# Altium PCB EtherIOv3_1.PcbDoc (part 2 of 2)
Units mil, origin at the board's own origin, x right, y up, seen from the top; angles counter-clockwise.
Board outline 4380 x 2505 mil, 2 copper layers (Top Layer, Bottom Layer), stack 63.824 mil thick; 108 components, 133 nets, 516 pads, 209 vias.
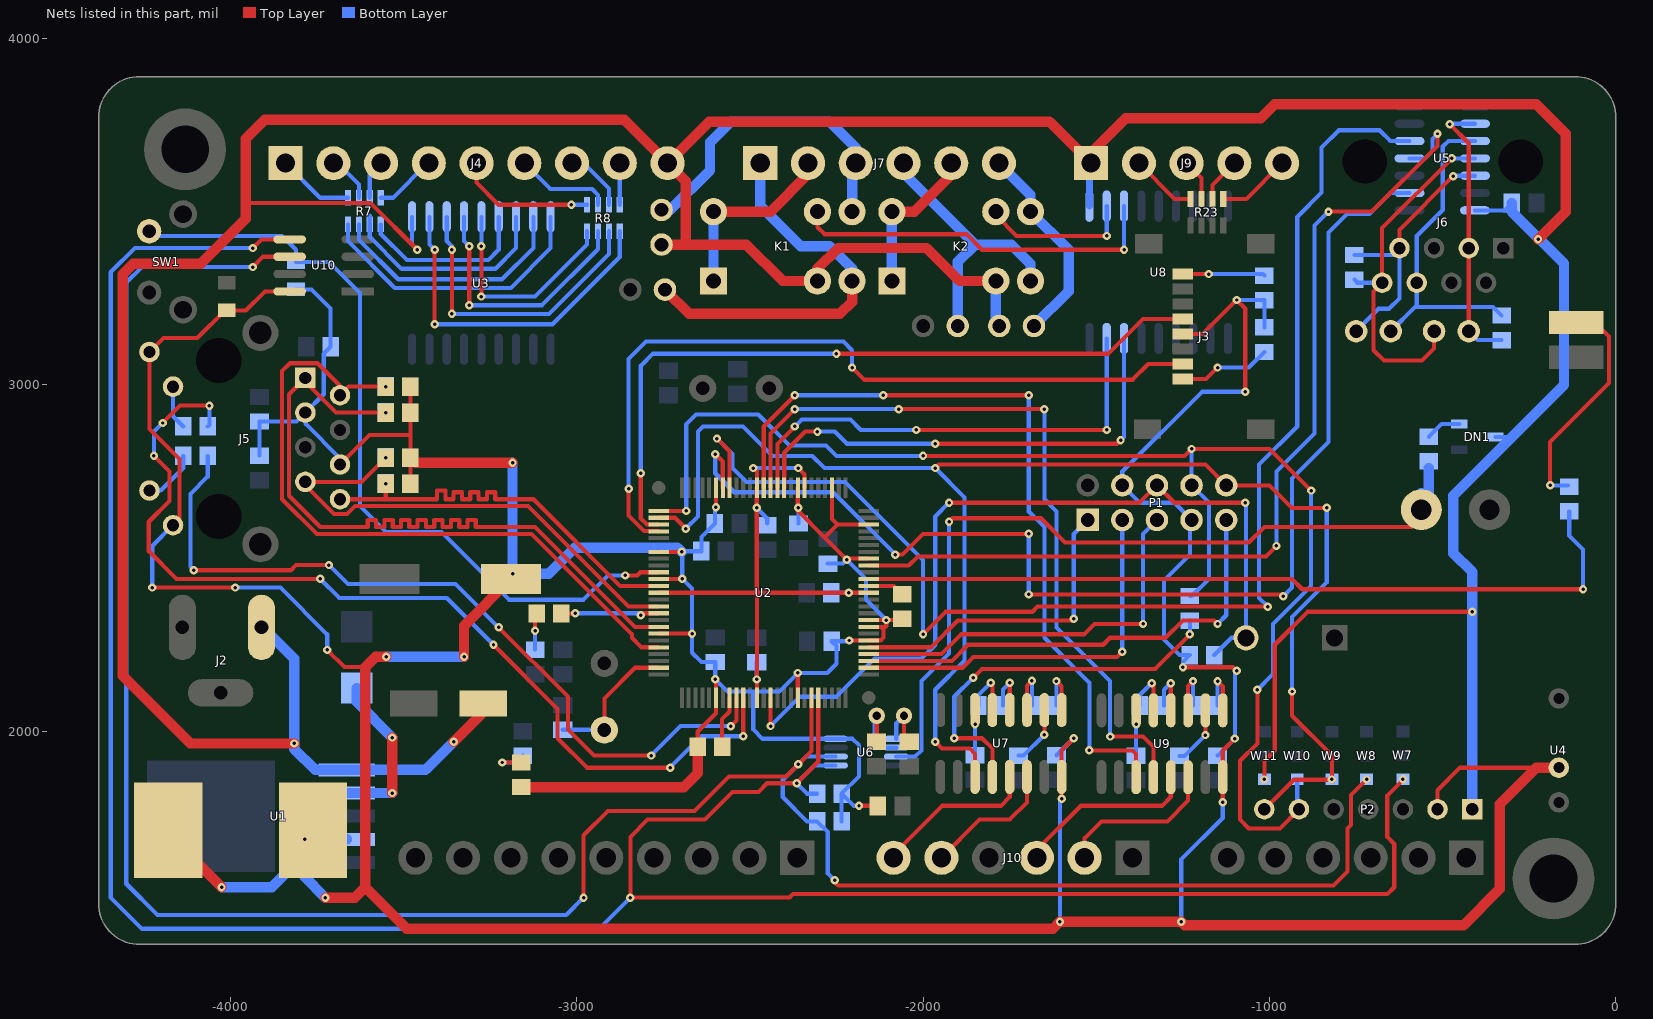
[diagram p2: the nets of this part, all layers, seen from the top]

## Via types
v1: diameter 24, hole 10, Top Layer to Bottom Layer, 206 vias
v2: diameter 24, hole 8, Top Layer to Bottom Layer, 3 vias

## Nets (pads, with @x,y where several pads share a name; then routed paths per layer and width w, separated by ;. In a path a pad name is that pad's centre, name@x,y a point inside that pad or via, vN(x,y) a via of type N, cw(c..) or ccw(c..) an arc to the next point about the centre after c; other vN are vias at no path point) (continued)
NetC10_2: C10.2 U2.49 X2.2 | length 404.8
  Top Layer w12: X2.2@-2920,2003.94 -2920,2095 -2831.54,2183.46 U2.49@-2763.15,2183.46
  Bottom Layer w12: C10.2@-3040,2004.57 -2920.63,2004.57 X2.2@-2920,2003.94
NetC20_2: C20.2 C21.2 C22.2 U2.7 U2.14 U2.38 U2.62 U2.88 | length 1624.5
  Top Layer w12: U2.38@-2763.15,2400 -2480,2400 ; v1(-2490,2760) -2479.68,2749.68 U2.14@-2479.68,2703.15 -2480,2702.83 v1(-2480,2645) -2480,2400 ; U2.62@-2479.68,2096.85 v1(-2479.68,2149.68) -2479.68,2399.68 -2480,2400 ; v1(-2360,2760) -2341.89,2741.89 U2.7@-2341.89,2703.15 ; U2.88@-2156.85,2400 v1(-2215,2400) -2480,2400
  Bottom Layer w12: v1(-2490,2760) v1(-2360,2760) ; v1@-2480,2150 C22.2@-2480,2199.13 ; v1(-2480,2645) -2450,2615 C21.2@-2450,2600.43 ; C20.2@-2265,2400 v1(-2215,2400)
NetC24_2: C24.2 R21.2 U6.3 | length 2397.9
  Top Layer w12: v1(-1925,2605) -1915,2615 -1660,2615 -1590,2545 -1060,2545 -1015,2590 -590,2590 -561.85,2618.15 C24.2@-561.85,2640
  Bottom Layer w12: U6.3@-2077.4,1927.2 -2022.8,1927.2 -2005,1945 -2005,2145 -1925,2225 v1(-1925,2605)
  Bottom Layer w30: C24.2@-561.85,2687.72 C24.2@-561.85,2640 -540.43,2661.42 R21.2@-540.43,2760
NetC25_2: C25.2 U6.1 X3.1 | length 156.7
  Top Layer w12: X3.1@-2055,2045 -2055,1985.43 C25.2@-2040,1970.43
  Bottom Layer w12: U6.1@-2077.4,1978.39 -2077.4,2022.6 X3.1@-2055,2045
NetC26_2: C26.2 U6.2 X3.2 | length 219.5
  Top Layer w12: C26.2@-2135,1970.43 -2133.74,1971.69 X3.2@-2133.74,2045
  Bottom Layer w12: X3.2@-2133.74,2045 -2140,2038.74 -2140,1975 -2117.8,1952.8 U6.2@-2077.4,1952.8
NetC29_1: C29.1 U7.3 | length 161.1
  Top Layer w12: U7.3@-1700,2061.46 -1700,2131.73 v1(-1685.87,2145.87)
  Bottom Layer w12: C29.1@-1685.87,2075 v1(-1685.87,2145.87)
NetC29_2: C29.2 U7.1 | length 159.8
  Top Layer w12: v1(-1615,2145) -1600,2130 U7.1@-1600,2061.46
  Bottom Layer w12: C29.2@-1615,2075 v1(-1615,2145)
NetC30_1: C30.1 U7.2 | length 171.3
  Top Layer w12: v1(-1650,1990) U7.2@-1650,2061.46
  Bottom Layer w12: C30.1@-1725,1930 -1710,1930 v1(-1650,1990)
NetC31_1: C31.1 U7.4 | length 151.5
  Top Layer w12: U7.4@-1750,2061.46 v1(-1750,2140)
  Bottom Layer w12: C31.1@-1769.13,2075 -1769.13,2120.87 v1(-1750,2140)
NetC31_2: C31.2 U7.5 | length 160.1
  Top Layer w12: v1(-1805,2140) -1800,2135 U7.5@-1800,2061.46
  Bottom Layer w12: C31.2@-1840,2075 -1840,2105 v1(-1805,2140)
NetC32_1: C32.1 U7.6 | length 130.6
  Top Layer w12: v1(-1850,2020) U7.6@-1850,2061.46
  Bottom Layer w12: C32.1@-1850,1930.87 v1(-1850,2020)
NetC34_1: C34.1 U9.3 | length 161.1
  Top Layer w12: U9.3@-1235,2060.59 -1235,2130.87 v1(-1220.87,2145)
  Bottom Layer w12: C34.1@-1220.87,2074.13 v1(-1220.87,2145)
NetC34_2: C34.2 U9.1 | length 159.8
  Top Layer w12: v1(-1150,2144.13) -1135,2129.13 U9.1@-1135,2060.59
  Bottom Layer w12: C34.2@-1150,2074.13 v1(-1150,2144.13)
NetC35_1: C35.1 U9.2 | length 171.3
  Top Layer w12: v1(-1185,1989.13) U9.2@-1185,2060.59
  Bottom Layer w12: C35.1@-1260,1929.13 -1245,1929.13 v1(-1185,1989.13)
NetC36_1: C36.1 U9.4 | length 151.5
  Top Layer w12: U9.4@-1285,2060.59 v1(-1285,2139.13)
  Bottom Layer w12: C36.1@-1304.13,2074.13 -1304.13,2120 v1(-1285,2139.13)
NetC36_2: C36.2 U9.5 | length 160.1
  Top Layer w12: v1(-1340,2139.13) -1335,2134.13 U9.5@-1335,2060.59
  Bottom Layer w12: C36.2@-1375,2074.13 -1375,2104.13 v1(-1340,2139.13)
NetC37_1: C37.1 U9.6 | length 130.6
  Top Layer w12: v1(-1385,2020) U9.6@-1385,2060.59
  Bottom Layer w12: C37.1@-1385,1930 v1(-1385,2020)
NetD1_2: D1.2 R1.2 | length 123.1
  Top Layer w12: v1(-3215,1910) D1.2@-3160,1910
  Bottom Layer w12: v1(-3215,1910) -3174.57,1910 R1.2@-3155,1929.57
NetD2_2: D2.2 L1.1 U1.2 | length 1279.7
  Top Layer w30: L1.1@-4178.66,1715 -4178.66,1703.66 v1(-4025,1550) ; v1(-3531.93,1821.93) v1(-3531.93,1981.93)
  Bottom Layer w30: v1(-4025,1550) -3880,1550 -3835,1595 -3835,1765 -3778.07,1821.93 U1.2@-3663.94,1821.93 v1(-3531.93,1821.93) ; D2.2@-3635,2125 -3635,2085 v1(-3531.93,1981.93)
NetD3_A: D3.A R24.1 | length 662.9
  Top Layer w12: v1(-190,2710) -190,2835 -20,3005 -20,3140 -60,3180 D3.A@-115,3180
  Bottom Layer w12: v1(-190,2710) R24.1@-139.13,2710
NetDN1_K: DN1.K R21.1 | length 103.1
  Bottom Layer w12: R21.1@-540,2850.43 -503.03,2887.4 DN1.K@-452.24,2887.4
NetJ3_1: J3.1 R2.1 | length 267.4
  Top Layer w12: J3.1@-1250,3016.69 -1183.31,3016.69 v1(-1150,3050)
  Bottom Layer w12: v1(-1150,3050) -1060,3050 R2.1@-1015,3095
NetJ3_8: J3.8 R5.1 | length 236.8
  Top Layer w12: J3.8@-1250,3319.84 v1(-1175.16,3319.84)
  Bottom Layer w12: v1(-1175.16,3319.84) -1019.41,3319.84 R5.1@-1015,3315.43
NetJ4_1: J4.1 R7.1 | length 221.4
  Bottom Layer w12: J4.1@-3840,3640 -3740,3540 R7.1@-3660,3540
NetJ4_2: J4.2 R7.2 | length 137.7
  Bottom Layer w12: J4.2@-3702.2,3640 -3690,3640 -3628.5,3578.5 R7.2@-3628.5,3540
NetJ4_3: J4.3 R7.3 | length 113.5
  Bottom Layer w12: R7.3@-3597.01,3540 -3597.01,3607.4 J4.3@-3564.41,3640
NetJ4_4: J4.4 R7.4 | length 216.9
  Bottom Layer w12: R7.4@-3565.51,3540 -3530,3540 -3430,3640 J4.4@-3426.61,3640 J4.4@-3390,3640
NetJ4_5: J4.5 R8.1 | length 401.4
  Top Layer w12: J4.5@-3288.82,3640 -3288.82,3583.82 -3225,3520 v1(-3015,3520)
  Bottom Layer w12: v1(-3015,3520) R8.1@-2970,3520
NetJ4_6: J4.6 R8.2 | length 297.3
  Bottom Layer w12: J4.6@-3151.02,3640 -3076.02,3565 -2955,3565 -2938.5,3548.5 R8.2@-2938.5,3520 R8.2@-2938.5,3538.38
NetJ4_7: J4.7 R8.3 | length 183.5
  Bottom Layer w12: J4.7@-3013.23,3640 -2980,3640 -2907.01,3567.01 R8.3@-2907.01,3520
NetJ4_8: J4.8 R8.4 | length 120
  Bottom Layer w12: R8.4@-2875.51,3520 -2875.51,3639.92 J4.8@-2875.43,3640
NetJ5_P10: J5.P10 R10.2 | length 127.2
  Bottom Layer w12: J5.P10@-4165,2995 -4165,2909.57 R10.2@-4135.43,2880
NetJ5_P11: J5.P11 R9.2 | length 159.7
  Bottom Layer w12: J5.P11@-4233,2695 -4200.43,2695 -4135.43,2760 -4135.43,2794.57 R9.2@-4135.87,2795
NetJ7_1: J7.1 K1.NC W4.1 | length 1141.7
  Top Layer w30: W4.1@-2745,3275 -2675,3205 -2240,3205 -2205,3240 K1.NC@-2205,3300
  Bottom Layer w30: J7.1@-2470,3640 -2470,3517.33 -2352.67,3400 -2270,3400 -2205,3335 K1.NC@-2205,3300
NetJ7_2: J7.2 K1.COM1 K1.COM2 | length 549.7
  Top Layer w30: K1.COM2@-2605,3500 -2440,3500 -2332.2,3607.8 J7.2@-2332.2,3640
  Bottom Layer w30: K1.COM1@-2605,3300 K1.COM2@-2605,3500
NetJ7_3: J7.3 K1.NO W3.1 | length 953.2
  Bottom Layer w30: W3.1@-2755,3505 -2730,3505 -2615,3620 -2615,3700 -2555,3760 -2270,3760 -2194.41,3684.41 J7.3@-2194.41,3640 -2205,3629.41 K1.NO@-2205,3500 K1.NO@-2205,3480
NetJ7_4: J7.4 K2.NC W5.1 | length 809.1
  Bottom Layer w30: J7.4@-2056.61,3640 -2056.61,3611.61 -1850,3405 ; W5.1@-1900,3170 -1900,3355 -1850,3405 ; K2.NC@-1690,3300 -1690,3350 -1745,3405 -1850,3405
NetJ7_5: J7.5 K2.COM1 K2.COM2 | length 449
  Top Layer w30: K2.COM2@-2090,3500 -2025,3500 -1918.82,3606.18 J7.5@-1918.82,3640
  Bottom Layer w30: K2.COM1@-2090,3300 K2.COM2@-2090,3500
NetJ7_6: J7.6 K2.NO W6.1 | length 594.7
  Bottom Layer w30: J7.6@-1781.02,3640 -1690,3548.98 K2.NO@-1690,3500 -1580,3390 -1580,3270 W6.1@-1680,3170
NetJ9_2: J9.2 R23.4 | length 192
  Top Layer w12: J9.2@-1377.2,3640 -1273.98,3536.77 R23.4@-1227.99,3536.77
NetJ9_3: J9.3 R23.3 | length 121
  Top Layer w12: J9.3@-1239.41,3640 -1196.5,3597.09 R23.3@-1196.5,3536.77
NetJ9_4: J9.4 R23.2 | length 129.5
  Top Layer w12: R23.2@-1165,3536.77 -1165,3576.61 J9.4@-1101.61,3640
NetJ9_5: J9.5 R23.1 | length 212.4
  Top Layer w12: R23.1@-1133.5,3536.77 -1067.05,3536.77 J9.5@-963.82,3640
NetK1_COIL2: K1.COIL2 U8.12 | length 1082.9
  Top Layer w12: K1.COIL2@-2305,3500 -2305,3455 -2285,3435 -1875,3435 -1830,3390 v1(-1420,3390)
  Bottom Layer w12: v1(-1420,3390) U8.12@-1420,3515.94
NetK2_COIL2: K2.COIL2 U8.11 | length 440.8
  Top Layer w12: K2.COIL2@-1790,3500 -1790,3490 -1730,3430 v1(-1470,3430)
  Bottom Layer w12: v1(-1470,3430) U8.11@-1470,3515.94
NetR7_5: R7.5 U3.15 | length 506.9
  Bottom Layer w12: R7.5@-3565.51,3463.23 -3565.51,3435.51 -3490,3360 -3255,3360 -3225,3390 U3.15@-3225,3485
NetR7_6: R7.6 U3.16 | length 636
  Bottom Layer w12: -3597.01,3487.99 R7.6@-3597.01,3463.23 -3597.01,3427.01 -3505,3335 -3235,3335 -3175,3395 U3.16@-3175,3485
NetR7_7: R7.7 U3.17 | length 722.5
  Bottom Layer w12: R7.7@-3628.5,3463.23 -3628.5,3418.5 -3515,3305 -3215,3305 -3125,3395 U3.17@-3125,3485
NetR7_8: R7.8 U3.18 | length 826.8
  Bottom Layer w12: R7.8@-3660,3463.23 -3660,3415 -3525,3280 -3190,3280 -3075,3395 U3.18@-3075,3485
NetR8_5: R8.5 U3.11 | length 1005
  Top Layer w12: v1(-3410,3175) v1(-3410,3390)
  Bottom Layer w12: U3.11@-3425,3485 -3425,3405 v1(-3410,3390) ; v1(-3410,3175) -3070,3175 -2875.51,3369.49 R8.5@-2875.51,3443.23
NetR8_6: R8.6 U3.12 | length 876.1
  Top Layer w12: v1(-3360,3205) v1(-3360,3390)
  Bottom Layer w12: U3.12@-3375,3485 -3375,3415 -3360,3400 v1(-3360,3390) ; v1(-3360,3205) -3080,3205 -2907.01,3377.99 R8.6@-2907.01,3443.23
NetR8_7: R8.7 U3.13 | length 751.3
  Top Layer w12: v1(-3310,3230) v1(-3310,3400)
  Bottom Layer w12: U3.13@-3325,3485 -3325,3415 v1(-3310,3400) ; v1(-3310,3230) -3100,3230 -2938.5,3391.5 R8.7@-2938.5,3443.23
NetR8_8: R8.8 U3.14 | length 635.4
  Top Layer w12: v1(-3275,3255) v1(-3275,3400)
  Bottom Layer w12: v1(-3275,3255) -3120,3255 -2970,3405 R8.8@-2970,3443.23 ; v1(-3275,3400) U3.14@-3275,3485
NetR9_1: R9.1 U2.59 | length 2318.3
  Top Layer w12: v1(-4105,2465) -3825,2465 -3810,2480 v1(-3715,2480) ; v1(-3225,2300) -3025,2100 -3025,2005 -2950,1930 v1(-2785,1930) ; v1(-2555,2015) -2538.74,2031.26 U2.59@-2538.74,2096.85
  Bottom Layer w12: v1(-4105,2465) -4115,2475 -4115,2685 -4065,2735 R9.1@-4065,2795 ; v1(-3715,2480) -3660,2425 -3350,2425 v1(-3225,2300) ; v1(-2785,1930) -2700,2015 v1(-2555,2015)
NetR10_1: R10.1 U2.60 | length 2814.6
  Top Layer w12: v1(-4220,2795) -4175,2750 -4175,2665 -4235,2605 -4235,2520 -4155,2440 v1(-3740,2440) ; v1(-4195,2890) -4145,2940 v1(-4060,2940) ; v1(-3240,2250) -3055,2065 -3055,1980 -2970,1895 v1(-2730,1895) ; v1(-2519.06,1985.94) U2.60@-2519.06,2096.85
  Bottom Layer w12: v1(-4220,2795) -4220,2865 v1(-4195,2890) ; R10.1@-4064.57,2880 -4060,2884.57 v1(-4060,2940) ; v1(-3740,2440) -3685,2385 -3375,2385 v1(-3240,2250) ; v1(-2730,1895) -2639.06,1985.94 v1(-2519.06,1985.94)
NetR11_1: R11.1 U2.58 | length 150.4
  Top Layer w12: R11.1@-2580,1955.43 -2580,2035 -2558.43,2056.57 U2.58@-2558.43,2096.85
NetR14_2: R14.2 R15.1 | length 106
  Top Layer w12: v1(-3120,2290) -3120,2335.43 R15.1@-3115.43,2340
  Bottom Layer w12: R14.2@-3120,2235.87 v1(-3120,2290)
NetR15_2: R15.2 U2.41 | length 298.4
  Top Layer w12: R15.2@-3043.62,2340.94 R15.2@-3044.57,2340 -3005,2340 v1(-3004.06,2340.94) ; v1(-2815,2335) -2815,2336.89 -2810.94,2340.94 U2.41@-2763.15,2340.94
  Bottom Layer w12: v1(-3004.06,2340.94) -2810.94,2340.94 -2815,2336.89 v1(-2815,2335)
NetR22_2: R22.2 U7.12 | length 1118
  Top Layer w12: v1(-1910,1980) -1830,1980 -1800,1950 U7.12@-1800,1868.54 ; v1(-1855,2155) -1830,2180 -1330,2180 v1(-1230,2280)
  Bottom Layer w12: v1(-1910,1980) -1910,2100 v1(-1855,2155) ; v1(-1230,2280) R22.2@-1230,2319.57
R\S\T\: P1.6 R16.1 S1.2 U2.64 | length 2480.2
  Top Layer w12: v1(-2440.32,2015.32) U2.64@-2440.32,2096.85 ; v1(-1925,2660) -1375,2660 P1.6@-1325,2710 -1275,2660 v1(-1070,2660)
  Bottom Layer w12: v1(-2440.32,2015.32) -2355.63,2100 -2250,2100 -2140,2210 -2005,2210 -1965,2250 -1965,2620 v1(-1925,2660) ; R16.1@-1159.57,2220 -1109.57,2270 S1.2@-1067.95,2270 -1067.95,2657.95 v1(-1070,2660)
REL0: U2.10 U8.7 | length 1413.9
  Top Layer w12: U2.10@-2400.94,2703.15 -2400.94,2804.06 -2340,2865 v1(-2305,2865) ; v1(-1965,2830) -1440,2830 v1(-1430,2840)
  Bottom Layer w12: v1(-2305,2865) -2255,2865 -2220,2830 v1(-1965,2830) ; v1(-1430,2840) -1420,2850 U8.7@-1420,3134.06
REL1: U2.11 U8.8 | length 1382.6
  Top Layer w12: U2.11@-2420.63,2703.15 -2420.63,2829.37 v1(-2370,2880) ; v1(-2020,2870) -1550,2870 v1(-1470,2870)
  Bottom Layer w12: v1(-2370,2880) -2350,2900 -2210,2900 -2180,2870 v1(-2020,2870) ; v1(-1470,2870) U8.8@-1470,3134.06
"RS485 DE": U2.92 U5.4 | length 2786.8
  Top Layer w12: U2.92@-2156.85,2478.74 -2041.26,2478.74 -2015,2505 -1010,2505 v1(-980,2535) ; v2(-830,3500) -705,3500 -515,3690 v2(-515,3725)
  Bottom Layer w12: v1(-980,2535) -980,2750 -870,2860 -870,3460 v2(-830,3500) ; U5.4@-595.87,3653.82 -551.18,3653.82 -530,3675 -530,3710 v2(-515,3725)
RX+: J6.7 R19.2 U5.12 W1.2 | length 783.3
  Top Layer w12: J6.7@-625,3394.76 -625,3447.6 v1(-470.08,3602.52)
  Bottom Layer w12: R19.2@-755,3374.76 -645,3374.76 J6.7@-625,3394.76 -625,3249.76 -655,3219.76 -685,3219.76 W1.2@-750,3154.76 ; v1(-470.08,3602.52) -468.78,3603.82 U5.12@-406.89,3603.82
RX-: J6.8 R19.1 U5.11 W2.2 | length 1059.9
  Top Layer w12: W2.2@-535,3154.76 W2.2@-525,3154.76 -525,3105 -560,3070 -670,3070 -700,3100 -700,3269.76 J6.8@-675,3294.76 -675,3452.6 v1(-473.78,3653.82)
  Bottom Layer w12: R19.1@-755,3303.9 -745.87,3294.76 J6.8@-675,3294.76 ; v1(-473.78,3653.82) U5.11@-406.89,3653.82
RXIN: C7.1 J5.P8 R17.1 U2.37 | length 1238.9
  Top Layer w12: J5.P8@-3683,2670 -3550,2670 ; v1(-3550.87,2715) -3550.87,2670.87 -3550,2670 ; U2.37@-2763.15,2419.68 -2874.68,2419.68 -3125,2670 -3235,2670 -3235,2690 -3259,2690 -3259,2670 -3283,2670 -3283,2690 -3307,2690 -3307,2670 -3331,2670 -3331,2690 -3355,2690 -3355,2670 -3379,2670 -3379,2695 -3403,2695 -3403,2670 -3550,2670
RXIP: C8.1 J5.P7 R18.1 U2.40 | length 1454.4
  Top Layer w12: v1(-3550.87,2790) -3620.87,2720 J5.P7@-3783,2720 -3783,2709.86 -3700.62,2627.47 -3662.53,2627.47 -3640,2650 -3140,2650 -2850.63,2360.63 U2.40@-2763.15,2360.63
SCK: J3.5 U2.28 | length 2120.5
  Top Layer w12: v1(-2815,2745) -2815,2614.57 -2797.28,2596.85 U2.28@-2763.15,2596.85 ; v1(-2250,3090) -1465,3090 -1365.08,3189.92 J3.5@-1250,3189.92
  Bottom Layer w12: v1(-2815,2745) -2815,3055 -2780,3090 v1(-2250,3090)
SCL: R3.1 U2.70 U6.6 U10.6 W8.3 | length 7037.1
  Top Layer w12: v1(-3935,3340) -3905,3370 U10.6@-3828.43,3370 ; v1@-2980,1530 -2980,1700 -2910,1770 -2660,1770 -2560,1870 -2395,1870 v1(-2360,1905) -2322.2,1942.8 U2.70@-2322.2,2096.85 ; v1@-2255,1565 -2245,1555 -815,1555 -775,1595 -775,1720 -765,1730 -765,1816.1 v1(-720,1861.1)
  Bottom Layer w12: v1(-3935,3340) -4255,3340 -4300,3295 -4300,1560 -4210,1470 -3030,1470 v1(-2980,1520) ; v1(-2255,1570) -2275,1590 -2275,1709.13 R3.1@-2305.87,1740 -2335,1740 -2405,1810 -2405,1860 v1(-2360,1905) -2337.8,1927.2 U6.6@-2252.6,1927.2
"SD S\S\": J3.2 U2.29 | length 2272.2
  Top Layer w12: v1(-2850,2700) -2850,2622.7 -2805.15,2577.85 -2763.83,2577.85 U2.29@-2763.15,2577.17 ; v1(-2205,3050) -2170,3015 -1395,3015 -1350,3060 J3.2@-1250,3060
  Bottom Layer w12: v1(-2850,2700) -2850,3075 -2800,3125 -2230,3125 -2205,3100 v1(-2205,3050)
SDA: R4.1 U2.71 U6.5 U10.5 W7.3 | length 7688.8
  Top Layer w12: v1(-3935,3395) -3910,3420 U10.5@-3828.43,3420 ; U2.71@-2302.52,2096.85 -2302.52,1912.48 v1(-2365,1850) -2450,1850 -2475,1825 -2550,1825 -2630,1745 -2795,1745 -2845,1695 v1(-2845,1520) -2385,1520 -2375,1530 -660,1530 -640,1550 -640,1675 -660,1695 -660,1815 -615,1860 v1(-615,1861.65)
  Bottom Layer w12: v1(-3935,3395) -4275,3395 -4345,3325 -4345,1520 -4255,1430 -2935,1430 v1(-2845,1520) ; R4.1@-2305.87,1820 -2335,1820 v1(-2365,1850) -2313.39,1901.61 U6.5@-2252.6,1901.61
STAT: R24.2 U2.90 | length 2315.6
  Top Layer w12: U2.90@-2156.85,2439.37 -935,2439.37 -905.63,2410 v1(-95,2410)
  Bottom Layer w12: R24.2@-135,2635 -135,2565 -95,2525 v1(-95,2410)
T\R\S\T\: R6.1 U2.89 | length 106.9
  Top Layer w12: U2.89@-2156.85,2419.68 -2084.25,2419.68 R6.1@-2060,2395.43
TCK: P1.1 U2.80 | length 927.6
  Top Layer w12: U2.80@-2156.85,2242.52 -1977.48,2242.52 -1900,2320 -1570,2320 v1(-1565,2325)
  Bottom Layer w12: v1(-1565,2325) -1565,2570 P1.1@-1525,2610
TDI: P1.9 U2.78 | length 1369.7
  Top Layer w12: U2.78@-2156.85,2203.15 -1916.85,2203.15 -1870,2250 -1480,2250 -1460,2270 -1300,2270 -1250,2320 -1160,2320 v1(-1150,2310)
  Bottom Layer w12: v1(-1150,2310) -1125,2335 P1.9@-1125,2610
TDO: P1.3 U2.77 | length 1131.1
  Top Layer w12: U2.77@-2156.85,2183.46 -1886.54,2183.46 -1855,2215 -1440,2215 v1(-1425,2230)
  Bottom Layer w12: v1(-1425,2230) P1.3@-1425,2610
TMS: P1.5 U2.79 | length 1144.5
  Top Layer w12: U2.79@-2156.85,2222.83 -1947.17,2222.83 -1890,2280 -1535,2280 -1505,2310 v1(-1365,2310)
  Bottom Layer w12: v1(-1365,2310) -1365,2570 P1.5@-1325,2610
TX+: J6.3 R20.1 U5.9 W2.1 | length 799.8
  Top Layer w12: v1(-480.08,3752.52) -425,3697.44 J6.3@-425,3394.76 W2.1@-425,3154.76
  Bottom Layer w12: v1(-480.08,3752.52) -478.78,3753.82 U5.9@-406.89,3753.82 ; W2.1@-425,3154.76 -399.57,3129.33 R20.1@-330,3129.33
TX-: J6.6 R20.2 U5.10 W1.1 | length 969.2
  Top Layer w12: J6.6@-585.08,3284.69 J6.6@-575,3294.76
  Bottom Layer w12: W1.1@-650,3154.76 -580,3224.76 ; U5.10@-406.89,3703.82 -483.78,3703.82 -500,3687.6 -500,3505 -575,3430 J6.6@-575,3294.76 -575,3229.76 -580,3224.76 ; R20.2@-330,3200.2 -354.57,3224.76 -580,3224.76
TXON: C4.1 J5.P2 R13.1 U2.46 | length 2013
  Top Layer w12: v1(-3550.87,2995) -3658,2995 J5.P2@-3683,2970 -3683,2997.44 -3748.09,3062.53 -3827.47,3062.53 -3850,3040 -3850,2670 -3750,2570 -3130,2570 -2840,2280 -2840,2270 -2812.52,2242.52 U2.46@-2763.15,2242.52
TXOP: C3.1 J5.P1 R12.1 U2.43 | length 2143.7
  Top Layer w12: v1(-3550.87,2920) -3695,2920 -3783,3008 J5.P1@-3783,3020 -3830,2973 -3830,2680 -3740,2590 -3603,2590 -3603,2610 -3579,2610 -3579,2590 -3555,2590 -3555,2610 -3531,2610 -3531,2590 -3507,2590 -3507,2610 -3483,2610 -3483,2590 -3459,2590 -3459,2610 -3435,2610 -3435,2590 -3411,2590 -3411,2610 -3387,2610 -3387,2590 -3363,2590 -3363,2610 -3339,2610 -3339,2590 -3315,2590 -3315,2610 -3291,2610 -3291,2590 -3120,2590 -2831.57,2301.57 U2.43@-2763.15,2301.57
U0RX: P1.8 P2.6 R22.1 U2.26 W10.3 | length 4064.4
  Top Layer w12: U2.26@-2763.15,2636.22 v1(-2683.78,2636.22) ; v1(-2000,2795) -1245,2795 v1(-1225,2815) -1000,2815 v1(-880,2695) ; v1(-1035,2120) -1035,1965 -1085,1915 -1085,1745 -1060,1720 -970,1720 P2.6@-915,1775
  Bottom Layer w12: v1(-2683.78,2636.22) -2683.78,2886.22 -2655,2915 -2475.83,2915 -2385.83,2825 -2280,2825 -2250,2795 v1(-2000,2795) ; R22.1@-1230,2390.43 -1224.57,2390.43 -1175,2440 -1175,2660 P1.8@-1225,2710 v1(-1225,2815) ; v1(-1035,2120) -990,2165 -990,2310 -880,2420 v1(-880,2695) ; W10.3@-920,1861.1 -920,1780 P2.6@-915,1775 P2.6@-905,1785
U0RXH: J10.6 U7.13 | length 520.4
  Top Layer w12: J10.6@-2085,1635 -2085,1645 -1945,1785 -1775,1785 -1750,1810 U7.13@-1750,1868.54 U7.13@-1750,1820
U0TX: P1.10 P2.7 U2.27 U7.11 W9.3 | length 4480.3
  Top Layer w12: U2.27@-2763.15,2616.54 -2716.54,2616.54 v1(-2685,2585) ; v1(-1965,1970) -1945,1950 -1865,1950 -1850,1935 U7.11@-1850,1868.54 ; v1(-1965,2760) -1955,2770 -1185,2770 P1.10@-1125,2710 -1000,2710 -935,2645 v1(-835,2645) ; P2.7@-1015,1775 -930,1860 -820,1860 -820,1930 -935,2045 v1(-935,2115)
  Bottom Layer w12: v1(-2685,2585) -2650,2620 -2650,2865 -2635,2880 -2520,2880 -2435,2795 -2320,2795 -2285,2760 v1(-1965,2760) -1880,2675 -1880,2205 -1965,2120 v1(-1965,1970) ; v1(-935,2115) -935,2330 -835,2430 v1(-835,2645) ; v1(-820,1861.1) W9.3@-815,1856.1
U0TXH: J10.5 U7.14 | length 387
  Top Layer w12: J10.5@-1947.2,1635 -1837.2,1745 -1750,1745 -1700,1795 U7.14@-1700,1868.54
U1RX: U2.12 U9.12 | length 2224.4
  Top Layer w12: U2.12@-2440.32,2703.15 -2440.32,2859.68 v1(-2370,2930) ; v1(-2070,2930) v1(-1650,2930) ; v1(-1460,1985) -1365,1985 -1335,1955 U9.12@-1335,1867.68
  Bottom Layer w12: v1(-2370,2930) v1(-2070,2930) ; v1(-1650,2930) -1650,2670 -1615,2635 -1615,2300 -1460,2145 v1(-1460,1985)
U1RXH: J10.3 U9.13 | length 530.5
  Top Layer w12: J10.3@-1671.61,1635 -1671.61,1658.39 -1545,1785 -1310,1785 -1285,1810 U9.13@-1285,1867.68
U1TX: U2.13 U9.11 | length 2283.1
  Top Layer w12: U2.13@-2460,2703.15 -2460,2880 v1(-2370,2970) ; v1(-2115,2970) v1(-1695,2970) ; v1(-1520,1945) -1395,1945 -1385,1935 U9.11@-1385,1867.68
  Bottom Layer w12: v1(-2370,2970) v1(-2115,2970) ; v1(-1695,2970) -1695,2635 -1650,2590 -1650,2270 -1520,2140 v1(-1520,1945)
U1TXH: J10.2 U9.14 | length 467.8
  Top Layer w12: J10.2@-1533.82,1635 -1533.82,1691.18 -1485,1740 -1295,1740 -1235,1800 U9.14@-1235,1867.68
U2RX: U2.19 U5.2 | length 3485.3
  Top Layer w12: v1(-2600,2800) -2578.11,2778.11 U2.19@-2578.11,2703.15 ; v1(-2080,2510) -2060,2510 -2000,2570 v1(-1695,2570) ; v1(-1695,2395) -965,2395 v1(-960,2390)
  Bottom Layer w12: v1(-2600,2800) -2600,2745 -2545,2690 -2260,2690 v1(-2080,2510) ; v1(-1695,2395) v1(-1695,2570) ; v1(-960,2390) -935,2415 -935,2730 -830,2835 -830,3440 -776.18,3493.82 -711.38,3493.82 -651.38,3553.82 U5.2@-595.87,3553.82
U2TX: U2.18 U5.5 | length 3861.2
  Top Layer w12: v1(-2595,2845) -2558.43,2808.43 U2.18@-2558.43,2703.15 ; v1(-2000,2280) -1935,2345 -1685,2345 -1670,2360 v1(-1005,2360)
  Bottom Layer w12: v1(-2595,2845) -2550,2800 -2550,2760 -2510,2720 -2225,2720 -2000,2495 v1(-2000,2280) ; v1(-1005,2360) -1030,2385 -1030,2770 -920,2880 -920,3485 -850,3555 -850,3685 -800,3735 -682.56,3735 -651.38,3703.82 U5.5@-595.87,3703.82
USER_BUTTON: R25.2 SW1.2 U2.35 | length 2325.2
  Top Layer w12: v1(-2860,2450) -2825,2450 -2815.94,2459.06 U2.35@-2763.15,2459.06
  Bottom Layer w12: SW1.2@-4234,3443.5 -4220.5,3430 -3850,3430 -3810,3390 R25.2@-3810,3354.37 -3714.37,3354.37 -3625,3265 -3625,2650 -3550,2575 -3390,2575 -3195,2380 -2980,2380 -2910,2450 v1(-2860,2450)
VCC3.3V: C2.2 C11.2 C12.1 C13.1 C14.2 C15.2 C16.2 C17.2 C18.2 C19.2 C27.1 C28.1 C33.1 C38.1 D1.1 J3.4 J5.P3 J5.P6 J5.P9 J5.P12 L1.2 P1.4 P1.7 P2.2 R2.2 R3.2 R4.2 R5.2 R6.2 R11.2 R12.2 R13.2 R16.2 R17.2 R18.2 R25.1 U1.4 U2.3 U2.8 U2.20 U2.32 U2.36 U2.44 U2.56 U2.68 U2.81 U2.83 U2.84 U2.93 U2.98 U4.2 U6.8 U7.16 U9.16 U10.8 | length 18211.5
  Top Layer w12: v1(-4225,2415) v1(-3985,2415) ; J5.P12@-4165,2595 -4146,2614 -4146,2786 -4233,2873 J5.P9@-4233,3095 -4193,3135 -4095,3135 -4015,3215 -3955,3215 -3900,3270 U10.8@-3828.43,3270 ; v1(-3720,2235) -3670.2,2185.2 -3610,2185.2 ; J5.P6@-3683,2770 -3598,2855 -3480,2855 ; R17.2@-3480,2715 R18.2@-3480,2790 -3480,2855 ; R13.2@-3480,2995 R12.2@-3480,2920 -3480,2855 ; U2.32@-2763.93,2518.89 U2.32@-2763.15,2518.11 v1(-2696.89,2518.11) ; U2.44@-2763.15,2281.89 v1(-2666.89,2281.89) ; U2.36@-2763.15,2439.37 -2695.63,2439.37 v1(-2695,2440) ; R11.2@-2650.43,1955 -2650.43,1999.57 -2597.8,2052.2 U2.56@-2597.8,2096.85 v1@-2597.8,2147.8 ; v1(-2597.8,2647.2) U2.20@-2597.8,2703.15 ; U2.68@-2361.57,2096.85 v1(-2361.57,2168.43) ; U2.8@-2361.57,2703.15 v1@-2361.57,2646.57 ; v1(-2360,2645) v1@-2361.57,2646.57 ; U2.3@-2263.15,2703.15 -2263.15,2612.68 -2247.32,2596.85 ; v1(-2212.8,2262.2) U2.81@-2156.85,2262.2 -2156.17,2262.89 -2122.03,2262.89 -2114.32,2270.6 -2114.32,2293.18 -2122.03,2300.89 ; v1(-2185,1785) C27.1@-2130.43,1785 ; U2.84@-2156.85,2321.26 v1(-2106.26,2321.26) ; U2.93@-2156.85,2498.43 -2216.57,2498.43 v1(-2220,2495) -2284.59,2559.59 ; U2.98@-2156.85,2596.85 -2247.32,2596.85 ; U2.83@-2156.17,2300.89 U2.83@-2156.85,2301.57 -2108.43,2301.57 -2106.26,2303.74 v1(-2106.26,2321.26) ; R6.2@-2055,2321.26 v1(-2106.26,2321.26) ; v1(-1600,1805) U7.16@-1600,1868.54 -1600,1945 v1(-1565,1980) ; v1(-1250,2185) -1105,2185 ; J3.4@-1250,3146.61 -1193.39,3146.61 v1(-1095,3245) -1070,3220 v1(-1070,2980) ; v1(-1135,1795) U9.16@-1135,1867.68 -1135,1944.13 v1(-1100,1979.13) ; P2.2@-515,1775 -515,1830 -450,1895 -230,1895 ; v1@-2361.57,2646.57 -2361.57,2636.57 -2284.59,2559.59 ; -2284.59,2559.59 -2247.32,2596.85
  Top Layer w30: v1(-3725,1520) -3640,1520 -3610,1550 ; v1(-3550,2215) -3580.2,2215 -3610,2185.2 -3610,1550 ; R18.2@-3480,2790 -3465,2775 v1(-3185,2775) ; v1(-3325,2215) -3325,2304.8 C2.2@-3189.8,2440 ; D1.1@-3160,1839.13 -2690.87,1839.13 -2650.43,1879.57 R11.2@-2650.43,1955 ; U4.2@-165,1895 -230,1895 -335,1790 -335,1545 -440,1440 -1245,1440 v1(-1255,1450) v1(-1605,1450) -1625,1430 -3490,1430 -3610,1550
  Bottom Layer w12: v1(-4225,2415) -4225,2535 J5.P12@-4165,2595 ; v1(-3985,2415) -3855,2415 -3720,2280 v1(-3720,2235) ; C12.1@-3915,2795.87 C11.2@-3915,2894.13 -3808.87,2894.13 J5.P3@-3783,2920 ; R25.1@-3810,3275.63 -3765.63,3275.63 -3710,3220 C13.1@-3710,3110 -3730,3090 -3730,2973 J5.P3@-3783,2920 ; J5.P6@-3683,2770 -3683,2788 -3783,2888 J5.P3@-3783,2920 ; v1(-2597.8,2647.2) -2600.87,2644.13 C17.2@-2600.87,2600 -2640,2560.87 C19.2@-2640,2520 -2695,2520 v1(-2696.89,2518.11) -2695,2516.22 v1(-2695,2440) -2666.89,2411.89 v1(-2666.89,2281.89) -2666.89,2226.89 -2640,2200 C14.2@-2600,2200 v1(-2600,2150) -2565,2115 -2490,2115 ; C16.2@-2360,2600 v1(-2360,2645) ; C18.2@-2275,2484.13 -2230.87,2484.13 v1(-2220,2495) -2165,2440 -2165,2380 v1(-2106.26,2321.26) ; R3.2@-2235,1740 R4.2@-2235,1820 ; v1(-2212.8,2262.2) -2215,2260 C15.2@-2264.13,2260 -2250,2245.87 -2250,2195 -2276.57,2168.43 v1(-2361.57,2168.43) -2415,2115 -2490,2115 ; v1(-2185,1785) -2200,1785 R4.2@-2235,1820 ; C28.1@-1615,1930.87 -1614.13,1930.87 v1(-1565,1980) ; v1(-1605,1450) -1605,1800 v1(-1600,1805) ; v1(-1255,1450) -1255,1630 -1135,1750 v1(-1135,1795) ; v1(-1250,2185) -1250,2200.43 R16.2@-1230.43,2220 -1260,2220 -1305,2265 -1305,2435 -1230,2510 -1230,2605 P1.7@-1225,2610 -1275,2660 -1375,2660 P1.4@-1425,2710 -1425,2750 -1195,2980 v1(-1070,2980) ; C33.1@-1150,1930 -1149.13,1930 v1(-1100,1979.13) v1@-1100,2170 ; v1(-1095,3245) -1015.43,3245 R5.2@-1015,3244.57 R2.2@-1015,3165.87 ; -2490,2115 -2490,2005 -2463.39,1978.39 U6.8@-2252.6,1978.39 -2203.39,1978.39 -2185,1960 -2185,1870 R4.2@-2235,1820
  Bottom Layer w30: v1(-3725,1520) -3785,1580 v1(-3785,1688.07) U1.4@-3663.94,1688.07 ; v1(-3550,2215) v1(-3325,2215) ; v1(-3185,2775) v1(-3185,2455) -3080,2455 -3005,2530 -2708.78,2530 v1(-2696.89,2518.11)
  other v1: -1095,2175
VCC5V: C1.2 C23.1 DN1.COM J2.1 J4.9 J9.1 K1.COIL1 K2.COIL1 P2.1 U1.1 U3.10 U5.14 U8.10 W3.2 W6.2 W11.3 | length 13304.8
  Top Layer w12: -3955,3525 -3595,3525 v1(-3460,3390) ; v1(-1015,1861.1) -1015,1915 -985,1945 -985,2250 -890,2345 v1(-415,2345)
  Top Layer w30: v1(-3815,1965) -4115,1965 -4310,2160 -4310,3320 -4280,3350 -4085,3350 -3955,3480 -3955,3525 -3955,3710 -3900,3765 -2862.64,3765 J4.9@-2737.64,3640 ; v1(-3355,1970) -3269.61,2055.39 C1.2@-3269.61,2080 ; W3.2@-2755,3405 -2690,3405 ; K2.COIL1@-1790,3300 -1895,3300 -1990,3395 -2245,3395 -2305,3335 K1.COIL1@-2305,3300 -2405,3300 -2510,3405 -2690,3405 ; v1(-225,3420) -145,3500 -145,3725 -230,3810 -985,3810 -1025,3770 -1415,3770 -1515,3670 J9.1@-1515,3640 -1635,3760 -2617.64,3760 J4.9@-2737.64,3640 ; J4.9@-2737.64,3640 -2685,3587.36 -2685,3410 -2690,3405
  Bottom Layer w12: U3.10@-3475,3485 -3475,3405 v1(-3460,3390) ; U5.14@-406.89,3503.82 -321.61,3503.82 C23.1@-300.43,3525 ; DN1.COM@-347.76,2850 -300,2850
  Bottom Layer w20: U8.10@-1520,3515.94 -1520,3635 J9.1@-1515,3640
  Bottom Layer w30: J2.1@-3905.63,2300 -3815,2209.37 v1(-3815,1965) -3815,1948.86 -3755,1888.86 U1.1@-3663.94,1888.86 -3436.14,1888.86 v1(-3355,1970) ; K2.COIL1@-1790,3300 -1790,3180 W6.2@-1780,3170 ; P2.1@-415,1775 -415,2460 -469.57,2514.57 -469.57,2680.43 -300,2850 -150,3000 -150,3350 -300.43,3500.43 C23.1@-300.43,3525
pads on no net: DN1.A J2.3 J5.MH3 J5.MH4 J5.P4 J5.P5 J6.MH1 J6.MH2 SW1.3 U1.6 U2.2 U2.5 U2.6 U2.51 U2.52 U2.53 U2.55 U2.101 U2.102 U5.1 U5.8 U5.13 U6.7 U7.7 U7.8 U7.9 U7.10 U8.5 U8.6 U8.13 U8.14 U9.7 U9.8 U9.9 U9.10 U10.1 U10.2 U10.3

## Polygon pours and split planes (outlines as drawn)
GND on Bottom Layer "BottomLayer-GND" (hatched 90Degree grid 10 track 10, remove dead copper, pour order 1000): -4380,1385 -4380,3890 0,3890 0,1385
GND on Top Layer "Top Layer-GND" (hatched 90Degree grid 10 track 10, remove dead copper, pour order 1001): -4380,1385 -4380,3890 0,3890 0,1385

## Keep-outs
Keep-Out Layer:
  the board outline again, w10

## Other copper
Top Layer:
  pour cut-out: -2815,3900 -2815,3165 -2120,3165 -2055,3100 -1640,3100 -1510,3230 -1510,3430 -1610,3530 -1610,3900
Bottom Layer:
  pour cut-out: -2815,3900 -2815,3165 -2120,3165 -2055,3100 -1640,3100 -1510,3230 -1510,3430 -1610,3530 -1610,3900

## Silkscreen, mask and mechanical layers (free items; w line width, h text height)
Top Overlay:
  rectangle: -480,2110 -455,2135
  rectangle: -480,2150 -455,2175
  rectangle: -480,2070 -455,2095
  lines w7.87: -690,2095 -507.5,2095 -507.5,2050 -245,2050 -245,2200 -505,2200 -550,2200 -690,2200 -690,2095
  text "COM 5V" at -1580,3565 h30 r270
  text "IR OUT" at -1515,3565 h25 r270
  text "IR OUT" at -1450,3565 h25 r270
  text "IR OUT" at -980,3565 h25 r270
  text "IR OUT" at -945,3565 h25 r270
  text "IR OUT" at -905,3565 h25 r270
  text "5V->NO" at -2875,3550 h35 r270
  text "LED0" at -3545,3545 h30 r270
  text "LED1" at -3490,3545 h30 r270
  text "LED2" at -3440,3545 h30 r270
  text "LED3" at -3390,3545 h30 r270
  text "LED4" at -3345,3545 h30 r270
  text "LED5" at -3300,3545 h30 r270
  text "LED6" at -3255,3545 h30 r270
  text "LED7" at -3210,3545 h30 r270
  text "COM 5V" at -3165,3545 h30 r270
  text "USER_BTN" at -4045,3470 h30
  text "PanCon" at -85,3295 h60 r90
  text "NC" at -2645,3235 h35 r270
  text "REL0" at -2600,3235 h35 r270
  text "NO" at -2560,3235 h35 r270
  text "NC" at -2200,3225 h35 r270
  text "REL1" at -2155,3225 h35 r270
  text "NO" at -2110,3225 h35 r270
  text "GND->NC" at -2920,3160 h35
  text "Ethernet" at -3575,3095 h60
  text "GND->NC" at -2070,3055 h35
  text "5V->NO" at -1825,3055 h35
  text "Diapro Kft." at -3400,2950 h60
  text "EtherIOv3_1" at -3395,2860 h60
  text "www.diapro.hu" at -3395,2760 h60
  text "RST" at -1105,2360 h30
  text "PanCon" at -425,2165 h20
  text "5V IN" at -3740,2160 h60 r90
  text "IR" at -210,2160 h60
  text "JUMPER:" at -650,2115 h20
  text "I2C radio" at -425,2060 h20
  text "B-/VCC5V" at -965,1850 h35 r90
  text "B+/U0RX" at -875,1850 h35 r90
  text "GND/U0TX" at -785,1850 h35 r90
  text "A-/SCL" at -690,1845 h35 r90
  text "A+/SDA" at -595,1845 h35 r90
  text "GND" at -500,1845 h35 r90
  text "Ext." at -275,1735 h60 r90
  text "COM GND" at -3455,1715 h30 r90
  text "BTN0" at -3310,1715 h30 r90
  text "BTN1" at -3172.2,1715 h30 r90
  text "BTN2" at -3034.41,1715 h30 r90
  text "BTN3" at -2896.61,1715 h30 r90
  text "BTN4" at -2758.82,1715 h30 r90
  text "BTN5" at -2621.02,1715 h30 r90
  text "BTN6" at -2483.23,1715 h30 r90
  text "BTN7" at -2352.2,1715.04 h30 r90
  text "0_RX" at -2129.92,1708.98 h25
  text "0_TX" at -1992.13,1708.98 h25
  text "GND" at -1854.33,1708.98 h25
  text "1_RX" at -1716.54,1708.98 h25
  text "1_TX" at -1578.74,1708.98 h25
  text "GND" at -1440.95,1708.98 h25

## Text inside footprints (layer, text, board x,y; h text height)
C24: Top Overlay "+" at -648.46,2659.68 h39.37 r180
P1: Top Overlay "9" at -1077.76,2580.47 h59.06; Top Overlay "10" at -1077.76,2680.47 h59.06; Top Overlay "1" at -1591.92,2580.47 h59.06; Top Overlay "2" at -1611.6,2680.47 h59.06